# EAGLE board dookie (EAGLE 5.06)
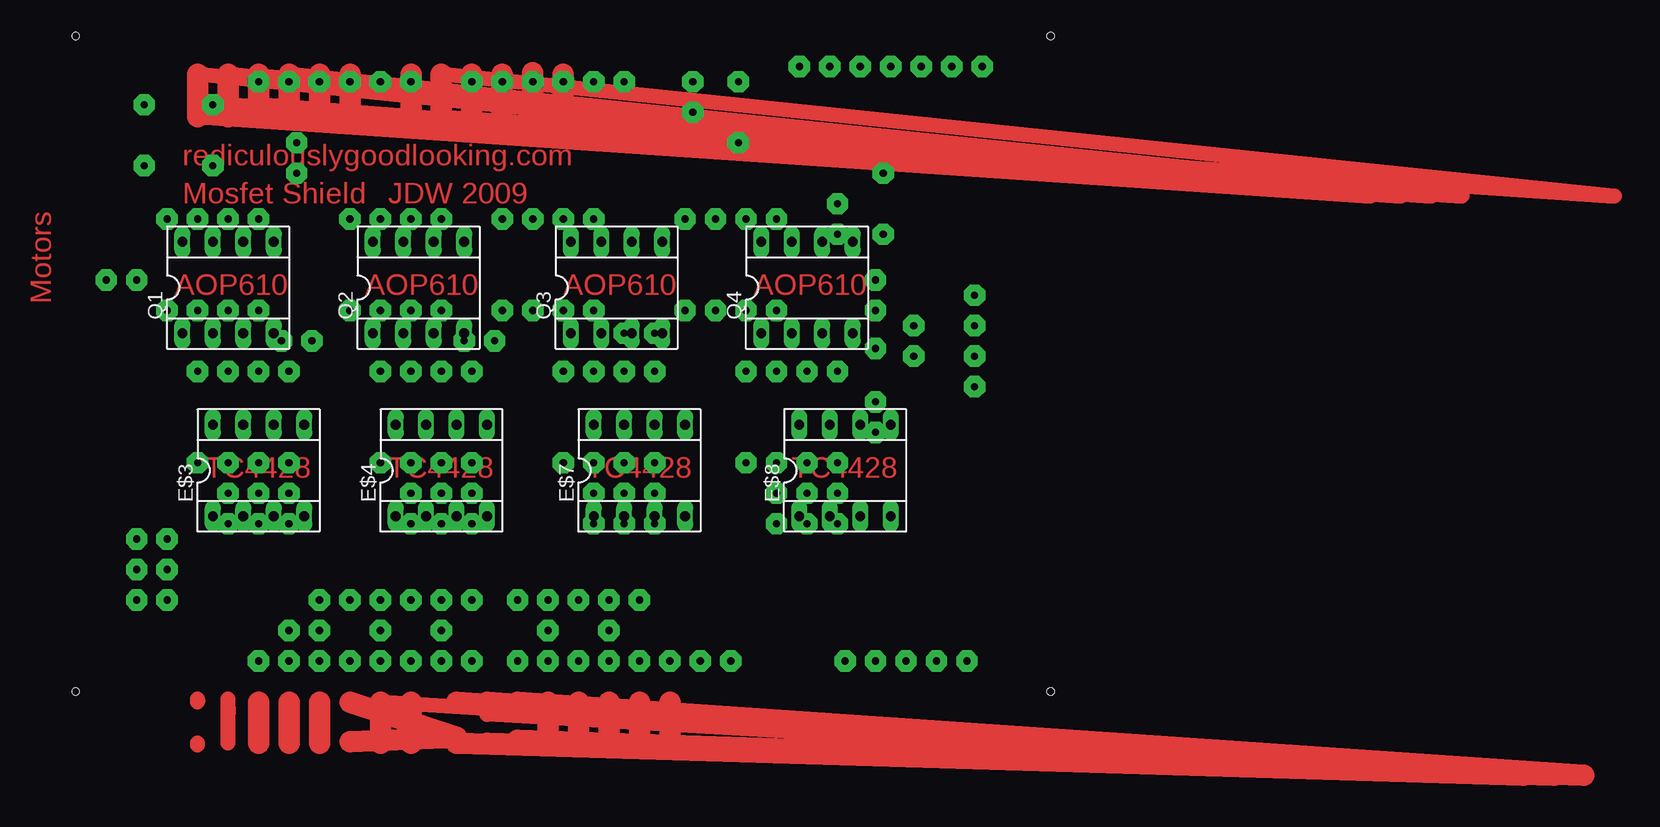
[diagram p0: board, top side]
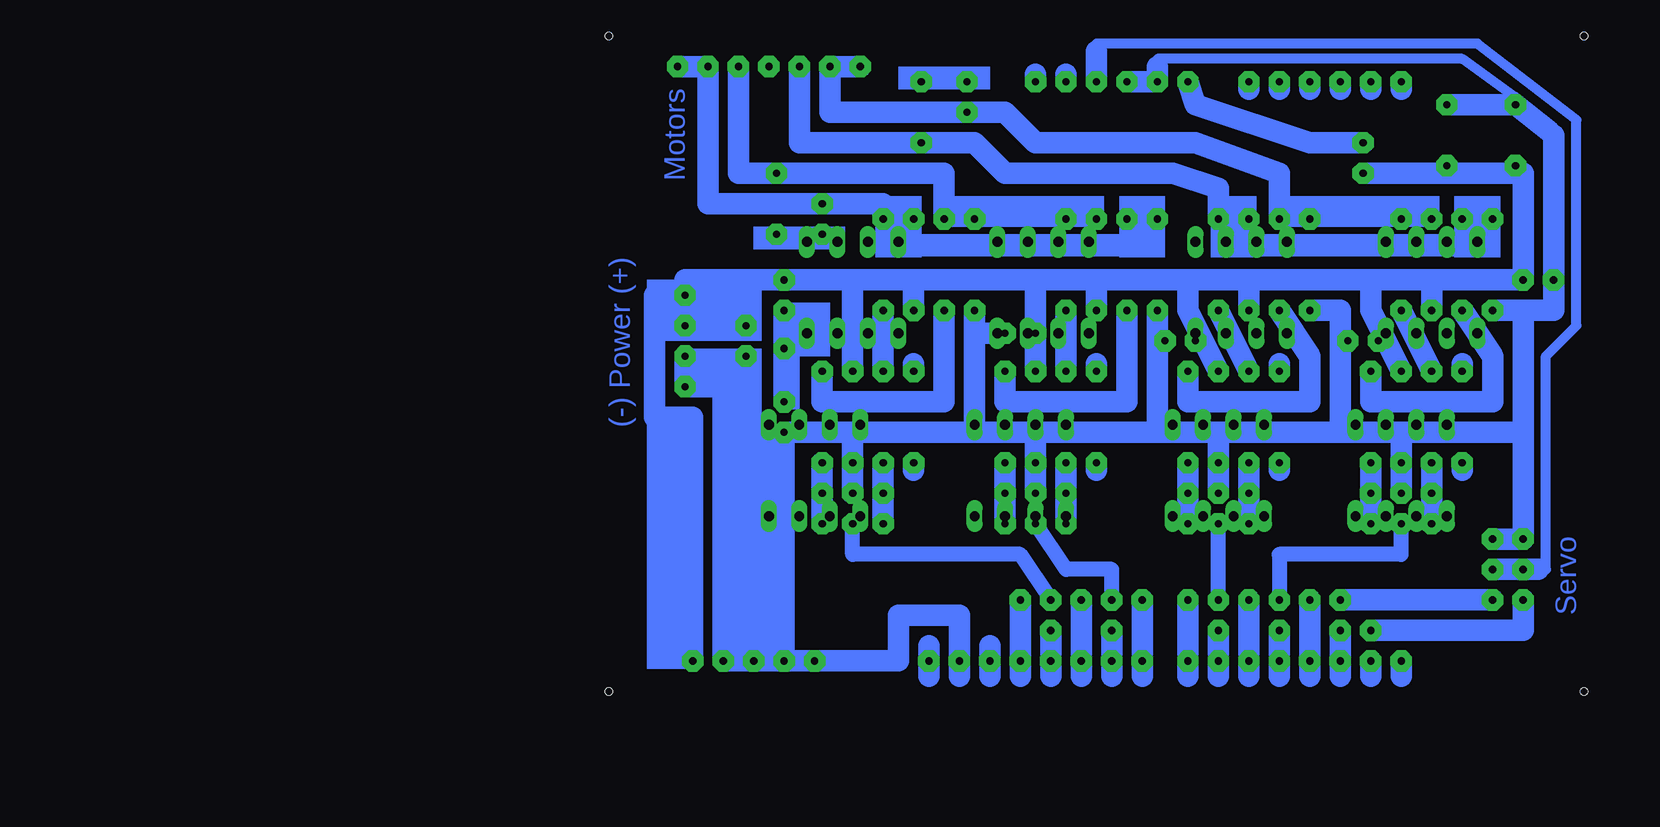
[diagram p1: board, bottom side, seen from below]

No outline drawn. Coordinates in mm, seen from the top.
Copper layers (1*16): Top 0.035mm / dielectric 1.5mm / Bottom 0.035mm
Design rules "default": minimum track width 10mil, minimum drill 24mil, track to track 8mil, track to pad 8mil, pad to pad 8mil, via to via 8mil, smd to smd 8mil, copper to edge 40mil, drill to drill 8mil, minimum pad ring 10mil, minimum via ring 8mil, stop-mask expansion 4mil, vias tented up to drill 0mil, thermal gap 10mil
Holes 0.6 mm at 0,0 0,54.61 81.28,54.61 81.28,0

## Footprints (pad centres in the part's own frame; a part is rotated, then mirrored left to right if it is on the bottom)
SOCKET-08 = drill 0.813 long: 1 -3.81,-3.81; 2 -1.27,-3.81; 3 1.27,-3.81; 4 3.81,-3.81; 5 3.81,3.81; 6 1.27,3.81; 7 -1.27,3.81; 8 -3.81,3.81

## Placement (x,y rotation side)
E$3  TC4427  [SOCKET-08]  15.24,18.41 0 top
E$4  TC4427  [SOCKET-08]  30.48,18.41 0 top
E$7  TC4427  [SOCKET-08]  46.99,18.41 0 top
E$8  TC4427  [SOCKET-08]  64.14,18.41 0 top
Q1  AOP610  [SOCKET-08]  12.7,33.66 0 top
Q2  AOP610  [SOCKET-08]  28.57,33.66 0 top
Q3  AOP610  [SOCKET-08]  45.09,33.66 0 top
Q4  AOP610  [SOCKET-08]  60.96,33.66 0 top

## Library data of the parts
E$3 E$4 E$7 E$8 Q1-Q4 = ic-package

## Tracks (layer width: path | path; a pad name or v marks a point on that pad's centre or on a via)
5V  (via drill 0.6 pad 1.78)
  Bottom 0.813: 3.81,10.16 3.17,10.16 3.17,27.94 0.64,30.48 0.64,47.62 8.89,53.98 40.64,53.98 40.64,53.34
  Bottom 1.778: 3.81,10.16 v7.62,10.16 | 40.64,53.34 v40.64,50.8
GND  (via drill 0.6 pad 1.78)
  Bottom 0.813: 2.54,46.35 2.54,46.99 5.71,49.53 10.16,52.7 35.56,52.7 v35.56,50.8
  Bottom 1.778: v66.67,2.54 v69.22,2.54 v71.75,2.54 71.75,25.4 v74.93,25.4 v74.93,27.94 | v66.67,2.54 v64.14,2.54 57.15,2.54 57.15,6.35 52.07,6.35 v52.07,2.54 52.07,1.27 | v60.96,16.51 v60.96,19.05 60.96,21.59 | 60.96,21.59 v66.67,21.59 v66.67,2.54 | v45.72,16.51 v45.72,19.05 45.72,21.59 | 50.8,21.59 60.96,21.59 | 50.8,21.59 50.8,29.84 | 50.8,29.84 v50.8,31.75 | 45.72,21.59 50.8,21.59 | v30.48,16.51 v30.48,19.05 30.48,21.59 | 35.56,21.59 45.72,21.59 | 35.56,21.59 v35.56,31.75 | 30.48,21.59 35.56,21.59 | v15.24,16.51 v15.24,19.05 15.24,21.59 | 20.32,21.59 30.48,21.59 | 20.32,21.59 20.32,31.75 v22.86,31.75 | 15.24,21.59 20.32,21.59 | 5.08,21.59 v5.08,12.7 v7.62,12.7 | v38.1,50.8 v35.56,50.8 35.56,52.07 | 5.08,21.59 5.08,31.75 | 5.08,21.59 15.24,21.59 | 5.08,31.75 3.81,31.75 | 5.08,31.75 2.54,31.75 v2.54,34.29 2.54,46.35 v5.71,48.9 v11.43,48.9 | 5.08,31.75 v7.62,31.75 | v48.26,29.84 50.8,29.84
S$1  (via drill 0.6 pad 1.78)
  Bottom 0.813: v43.18,19.05 v43.18,16.51
  Bottom 1.778: v43.18,13.97 v43.18,19.05
S$2  (via drill 0.6 pad 1.78)
  Bottom 1.778: v15.24,2.54 15.24,1.27
S$3  (via drill 0.6 pad 1.78)
  Bottom 1.27: v15.24,13.97 15.24,11.43 25.4,11.43 v25.4,7.62
S$4  (via drill 0.6 pad 1.78)
  Bottom 1.778: v39.37,5.08 39.37,3.17
S$5
  Bottom 1.778: 49.53,1.27 49.53,3.81
S$6  (via drill 0.6 pad 1.78)
  other vias: 48.26,16.51
S$7
  Bottom 1.778: 54.61,1.27 54.61,3.81
S$8  (via drill 0.6 pad 1.78)
  Bottom 1.778: v25.4,5.08 25.4,3.17
S$9  (via drill 0.6 pad 1.78)
  Bottom 1.27: v55.88,39.37 55.88,36.83 38.1,36.83 v38.1,39.37 | v38.1,39.37 v35.56,39.37 v38.1,39.37
  Bottom 1.778: v75.56,52.07 v73.03,52.07 73.03,40.64 v63.5,40.64 58.42,40.64 v58.42,39.37 v55.88,39.37
S$10  (via drill 0.6 pad 1.78)
  Bottom 1.778: v44.45,5.08 44.45,3.17
S$11  (via drill 0.6 pad 1.78)
  Bottom 1.27: v40.64,39.37 v53.34,39.37
  Bottom 1.778: v70.48,52.07 70.48,43.18 v67.31,43.18 53.34,43.18 v53.34,39.37
S$12  (via drill 0.6 pad 1.78)
  Bottom 1.778: v17.78,2.54 17.78,1.27
S$13  (via drill 0.6 pad 1.78)
  Bottom 1.778: 76.2,33.02 77.47,33.02 77.47,22.86 74.3,22.86 v74.3,2.54
S$14  (via drill 0.6 pad 1.78)
  other vias: 45.72,29.84
S$15  (via drill 0.6 pad 1.78)
  Bottom 0.406: v17.78,13.97 v17.78,16.51
  Bottom 1.27: v17.78,13.97 v17.78,16.51
  Bottom 1.778: v17.78,13.97 v17.78,19.05
S$16  (via drill 0.6 pad 1.78)
  other vias: 69.85,30.48
S$17  (via drill 0.6 pad 1.78)
  other vias: 5.71,43.81
S$18  (via drill 0.6 pad 1.78)
  Bottom 1.778: v5.08,7.62 5.08,5.08 v17.78,5.08
S$19  (via drill 0.6 pad 1.78)
  other vias: 5.08,10.16
S$20  (via drill 0.6 pad 1.78)
  other vias: 11.43,43.81
S$21  (via drill 0.6 pad 1.78)
  other vias: 67.94,52.07
S$22  (via drill 0.6 pad 1.78)
  other vias: 32.38,29.21
S$23  (via drill 0.6 pad 1.78)
  other vias: 15.24,39.37
S$24  (via drill 0.6 pad 1.78)
  Bottom 1.778: v12.7,26.67 v15.24,31.75
S$25  (via drill 0.6 pad 1.78)
  Bottom 1.778: v43.18,50.8 43.18,51.44
S$26  (via drill 0.6 pad 1.78)
  Bottom 1.778: v45.72,50.8 45.72,51.44
S$27
  Top 1.27: 107.95,41.27 10.16,48.9 | 107.95,41.27 10.16,51.44 | 107.95,41.27 10.16,47.88 10.16,47.62
  Top 1.778: 10.16,47.88 10.16,51.44
S$28  (via drill 0.6 pad 1.78)
  other vias: 22.86,39.37
S$29  (via drill 0.6 pad 1.78)
  Bottom 1.778: 27.94,50.16 v27.94,50.8
S$30  (via drill 0.6 pad 1.78)
  Bottom 1.778: 27.94,3.17 v27.94,7.62
S$31  (via drill 0.6 pad 1.78)
  Bottom 1.778: 25.4,50.16 v25.4,50.8
S$32  (via drill 0.6 pad 1.78)
  Bottom 1.27: v45.72,13.97 43.18,10.16 39.37,10.16 v39.37,7.62
S$33  (via drill 0.6 pad 1.78)
  other vias: 34.92,29.21
S$34  (via drill 0.6 pad 1.78)
  Bottom 1.778: 22.86,50.16 v22.86,50.8
S$35  (via drill 0.6 pad 1.78)
  Bottom 1.778: v7.62,7.62 v20.32,7.62
S$36  (via drill 0.6 pad 1.78)
  Bottom 1.778: v30.48,5.08 30.48,3.17
S$37  (via drill 0.6 pad 1.78)
  Bottom 1.778: 20.32,50.16 v20.32,50.8
S$38  (via drill 0.6 pad 1.78)
  Bottom 1.778: v66.67,31.75 v66.67,28.57 v66.67,24.13
S$39  (via drill 0.6 pad 1.78)
  Bottom 1.778: 17.78,50.16 v17.78,50.8
S$40  (via drill 0.6 pad 1.78)
  Bottom 1.778: 15.24,50.16 v15.24,50.8
S$41  (via drill 0.6 pad 1.78)
  Bottom 1.778: v20.32,5.08 v20.32,2.54 20.32,1.27
S$42  (via drill 0.6 pad 1.78)
  Bottom 1.778: v22.86,7.62 v22.86,2.54 22.86,1.27
S$43  (via drill 0.6 pad 1.78)
  Bottom 1.778: v25.4,2.54 25.4,1.27
S$44  (via drill 0.6 pad 1.78)
  Bottom 1.27: v12.7,39.37 v25.4,39.37
  Bottom 1.778: v25.4,39.37 25.4,43.18 32.38,45.72 45.72,45.72 48.26,48.26 v51.44,48.26 62.87,48.26 v62.87,52.07 v60.33,52.07
S$45  (via drill 0.6 pad 1.78)
  Bottom 1.778: v25.4,31.75 22.86,27.94 22.86,24.13 33.02,24.13 v33.02,26.67
S$46  (via drill 0.6 pad 1.78)
  Bottom 1.778: v27.94,2.54 27.94,1.27
S$47  (via drill 0.6 pad 1.78)
  Bottom 1.778: v30.48,2.54 30.48,1.27
S$48  (via drill 0.6 pad 1.78)
  Bottom 1.778: v33.02,2.54 33.02,1.27
S$49  (via drill 0.6 pad 1.78)
  Bottom 1.27: v30.48,39.37 v27.94,39.37 27.94,36.83 10.16,36.83 v10.16,39.37 v7.62,39.37
  Bottom 1.778: v30.48,39.37 30.48,41.91 34.29,43.18 48.26,43.18 50.8,45.72 v55.24,45.72 65.41,45.72 v65.41,52.07
S$50
  Top 1.27: 30.48,51.44 128.27,41.27 30.48,47.88 30.48,47.62
  Top 1.778: 30.48,47.88 30.48,51.44
S$51  (via drill 0.6 pad 1.78)
  other vias: 58.42,16.51
S$52  (via drill 0.6 pad 1.78)
  Bottom 1.778: v36.83,2.54 36.83,1.27
S$53  (via drill 0.6 pad 1.78)
  other vias: 17.14,29.21
S$54  (via drill 0.6 pad 1.78)
  Bottom 1.778: v10.16,31.75 7.62,27.94 7.62,24.13 17.78,24.13 v17.78,26.67
S$55
  Top 1.27: 113.03,41.27 15.24,48.9 | 113.03,41.27 15.24,51.31 | 113.03,41.27 15.24,47.88 15.24,47.62
  Top 1.778: 15.24,51.44 15.24,51.31 15.24,47.88
S$56  (via drill 0.6 pad 1.78)
  other vias: 63.5,16.51
S$57  (via drill 0.6 pad 1.78)
  Bottom 1.778: v39.37,2.54 39.37,1.27
S$58  (via drill 0.6 pad 1.78)
  other vias: 19.68,29.21
S$59  (via drill 0.6 pad 1.78)
  Bottom 0.61: v44.45,7.62 44.45,7.75
  Bottom 1.27: v60.96,13.97 60.96,11.43 46.99,11.43 v44.45,7.62
S$60
  Top 1.27: 34.29,-4.32 34.29,-4.45 | 25.4,-4.45 25.4,-4.32 25.4,-4.19 | 25.4,-0.64 25.4,-0.89 123.19,-6.99 | 123.19,-6.99 34.29,-1.91 | 25.4,-3.94 123.19,-6.99
  Top 1.778: 34.29,-0.89 123.19,-6.99 34.29,-4.32 | 25.4,-3.94 25.4,-0.89 | 25.4,-3.94 25.4,-4.19 | 25.4,-3.94 25.4,-4.32
S$61  (via drill 0.6 pad 1.78)
  Bottom 1.778: v41.91,2.54 41.91,1.27
S$62  (via drill 0.6 pad 1.78)
  other vias: 55.24,50.8
S$63  (via drill 0.6 pad 1.78)
  Bottom 1.778: v44.45,2.54 44.45,1.27
S$64
  Top 1.27: 110.49,41.27 12.7,48.9 | 110.49,41.27 12.7,51.44 | 110.49,41.27 12.7,47.88 12.7,47.62
  Top 1.778: 12.7,47.88 12.7,51.44
S$65  (via drill 0.6 pad 1.78)
  Bottom 1.27: v30.48,7.62 v30.48,13.97
S$66  (via drill 0.6 pad 1.78)
  Bottom 1.778: v46.99,7.62 v46.99,2.54 46.99,1.27
S$67
  Top 1.27: 17.78,51.44 115.57,41.27 17.78,47.88 17.78,47.62
  Top 1.778: 17.78,47.88 17.78,51.44
S$68  (via drill 0.6 pad 1.78)
  other vias: 49.53,2.54
S$69  (via drill 0.6 pad 1.78)
  other vias: 51.44,50.8
S$70  (via drill 0.6 pad 1.78)
  other vias: 54.61,2.54
S$71  (via drill 0.6 pad 1.78)
  Bottom 1.778: 33.02,3.17 v33.02,7.62
S$72  (via drill 0.6 pad 1.78)
  other vias: 63.5,38.1
S$73  (via drill 0.6 pad 1.78)
  other vias: 67.31,38.1
S$74  (via drill 0.6 pad 1.78)
  other vias: 69.85,27.94
S$75
  Top 1.27: 10.16,-4.45 10.16,-4.32
S$96  (via drill 0.6 pad 1.78)
  other vias: 43.18,39.37
S$98  (via drill 0.6 pad 1.78)
  other vias: 50.8,39.37
S$104  (via drill 0.6 pad 1.78)
  Bottom 1.778: v38.1,31.75 38.1,24.13 48.26,24.13 v48.26,26.67
S$108  (via drill 0.6 pad 1.78)
  Bottom 1.778: v53.34,31.75 53.34,24.13 63.5,24.13 v63.5,26.67
S$111
  Top 1.27: 20.32,48.26 20.32,48.9 | 20.32,48.26 20.32,47.88 20.32,47.62 | 20.32,48.26 20.32,51.44
  Top 1.778: 20.32,47.88 20.32,51.44
S$114
  Top 1.27: 22.86,47.88 22.86,47.62
  Top 1.778: 22.86,47.88 22.86,51.44
S$115
  Top 1.27: 27.94,48.26 27.94,48.9 | 27.94,48.26 27.94,47.88 27.94,47.62 | 27.94,48.26 27.94,51.44
  Top 1.778: 27.94,47.88 27.94,51.44
S$116
  Top 1.27: 33.02,48.26 33.02,48.9 | 33.02,48.26 33.02,47.88 33.02,47.62 | 33.02,48.26 33.02,51.44
  Top 1.778: 33.02,47.88 33.02,51.44
S$117
  Top 1.27: 35.56,47.88 35.56,47.62
  Top 1.778: 35.56,47.88 35.56,51.44
S$118
  Top 1.27: 38.1,48.26 38.1,48.9 | 38.1,48.26 38.1,47.88 38.1,47.62 | 38.1,48.26 38.1,51.44
  Top 1.778: 38.1,47.88 38.1,51.56
S$119
  Top 1.27: 40.64,47.88 40.64,47.62
  Top 1.778: 40.64,47.88 40.64,51.44
S$120
  Top 1.27: 10.16,-0.64 10.16,-0.89
S$121
  Top 1.27: 12.7,-1.27 12.7,-0.64 | 12.7,-1.27 12.7,-1.91 | 12.7,-4.32 12.7,-1.27
S$122
  Top 1.27: 15.24,-0.89 15.24,-0.64 | 15.24,-4.32 15.24,-4.45
  Top 1.778: 15.24,-4.32 15.24,-0.89
S$123
  Top 1.27: 17.78,-0.89 17.78,-0.64 | 17.78,-4.32 17.78,-4.45
  Top 1.778: 17.78,-4.32 17.78,-0.89
S$124
  Top 1.27: 20.32,-0.89 20.32,-0.64 | 20.32,-4.19 20.32,-4.32
  Top 1.778: 20.32,-3.94 20.32,-0.89 | 20.32,-3.94 20.32,-4.19 | 20.32,-3.94 20.32,-4.32
S$126
  Top 1.27: 27.94,-1.27 27.94,-1.91 | 27.94,-1.27 27.94,-1.02 | 27.94,-0.89 27.94,-0.64 | 27.94,-3.94 27.94,-1.27 | 27.94,-4.32 27.94,-4.45
  Top 1.778: 27.94,-1.02 27.94,-0.89 27.94,-3.94 27.94,-4.32
S$127
  Top 1.27: 31.75,-4.32 31.75,-4.45
  Top 1.778: 31.75,-0.89 120.65,-6.99 31.75,-4.32
S$128  (via drill 0.6 pad 1.78)
  Bottom 1.778: v10.16,26.67 10.16,27.3
S$129
  Top 1.27: 36.83,-4.45 36.83,-4.32 36.83,-4.19 | 125.73,-6.99 36.83,-1.91
  Top 1.778: 36.83,-0.89 125.73,-6.99 36.83,-4.06 | 36.83,-4.06 36.83,-4.19 | 36.83,-4.06 36.83,-4.32
S$130
  Top 1.27: 39.37,-0.89 39.37,-0.64 | 39.37,-4.32 39.37,-4.45
  Top 1.778: 39.37,-4.32 39.37,-0.89
S$131
  Top 1.27: 41.91,-0.89 41.91,-0.64 | 41.91,-1.02 41.91,-4.32 41.91,-4.45
  Top 1.778: 41.91,-1.02 41.91,-0.89 41.91,-4.32
S$132
  Top 1.27: 44.45,-0.89 44.45,-0.64 | 44.45,-4.32 44.45,-4.45
  Top 1.778: 44.45,-4.32 44.45,-0.89
S$133
  Top 1.27: 46.99,-0.89 46.99,-0.64 | 46.99,-4.32 46.99,-4.45
  Top 1.778: 46.99,-4.32 46.99,-0.89
S$134
  Top 1.27: 49.53,-0.89 49.53,-0.64 | 49.53,-4.19 49.53,-1.27 | 49.53,-4.32 49.53,-4.45
  Top 1.778: 49.53,-1.27 49.53,-0.89 49.53,-4.19 49.53,-4.32
S$138  (via drill 0.6 pad 1.78)
  Bottom 1.778: v25.4,26.67 25.4,27.3
S$139  (via drill 0.6 pad 1.78)
  Bottom 1.778: v27.94,26.67 v30.48,31.75
S$142  (via drill 0.6 pad 1.78)
  Bottom 1.778: v10.16,19.05 10.16,18.41
S$143  (via drill 0.6 pad 1.78)
  Bottom 0.813: v12.7,13.97 v12.7,16.51
  Bottom 1.778: v12.7,13.97 v12.7,19.05
S$146  (via drill 0.6 pad 1.78)
  Bottom 1.778: v25.4,19.05 25.4,18.41
S$147  (via drill 0.6 pad 1.78)
  Bottom 0.406: v27.94,13.97 v27.94,16.51
  Bottom 0.813: v27.94,16.51 v27.94,19.05
  Bottom 1.27: v27.94,13.97 v27.94,16.51
  Bottom 1.778: v27.94,13.97 v27.94,19.05
S$149  (via drill 0.6 pad 1.78)
  Bottom 0.406: v33.02,13.97 v33.02,16.51
  Bottom 1.27: v33.02,13.97 v33.02,16.51
  Bottom 1.778: v33.02,13.97 v33.02,19.05
S$150  (via drill 0.6 pad 1.78)
  Bottom 1.778: v40.64,26.67 40.64,27.3
S$151  (via drill 0.6 pad 1.78)
  Bottom 1.778: v43.18,26.67 v43.18,31.75
S$154  (via drill 0.6 pad 1.78)
  Bottom 1.778: v55.88,26.67 55.88,27.3
S$155  (via drill 0.6 pad 1.78)
  Bottom 1.778: v58.42,26.67 v58.42,31.75
S$158  (via drill 0.6 pad 1.78)
  Bottom 1.778: v40.64,19.05 40.64,18.41
S$159  (via drill 0.6 pad 1.78)
  Bottom 1.778: 41.91,3.17 v41.91,7.62
S$161  (via drill 0.6 pad 1.78)
  Bottom 1.778: 36.83,3.17 v36.83,7.62
S$163  (via drill 0.6 pad 1.78)
  Bottom 1.778: v48.26,13.97 v48.26,19.05
S$164  (via drill 0.6 pad 1.78)
  Bottom 1.778: v55.88,19.05 55.88,18.41
S$165  (via drill 0.6 pad 1.78)
  Bottom 1.778: v58.42,13.97 v58.42,19.05
S$167  (via drill 0.6 pad 1.78)
  Bottom 1.778: v63.5,13.97 v63.5,19.05
S$169
  Top 1.27: 22.86,-0.89 22.86,-0.64 | 22.86,-4.19 22.86,-4.45
  Top 1.778: 22.86,-0.89 31.75,-3.81 22.86,-4.19
VCC  (via drill 0.6 pad 1.78)
  Bottom 1.778: v74.93,33.02 v74.93,30.48 70.48,30.48 | v74.93,33.02 74.93,34.29 v66.67,34.29 60.96,34.29 | 60.96,34.29 v60.96,26.67 | 55.88,34.29 60.96,34.29 | 55.88,34.29 v55.88,31.75 | 45.72,34.29 55.88,34.29 | 45.72,34.29 v45.72,26.67 | v30.48,26.67 33.02,31.75 33.02,34.29 | 40.64,34.29 45.72,34.29 | 40.64,34.29 v40.64,31.75 | 33.02,34.29 40.64,34.29 | v15.24,26.67 17.78,31.75 17.78,34.29 | 27.94,34.29 33.02,34.29 | 27.94,34.29 v27.94,31.75 | 17.78,34.29 27.94,34.29 | 12.7,34.29 17.78,34.29 | 12.7,34.29 v12.7,31.75 | v18.41,43.18 5.08,43.18 v5.08,34.29 12.7,34.29 | v74.93,33.02 75.56,33.02
VIN  (via drill 0.6 pad 1.78)
  Bottom 1.778: v33.02,50.8 32.38,48.9 22.86,45.72 v18.41,45.72
(copper drawn outside any net)
  shapes: Bottom area x27

## Text on the board
Top: rediculouslygoodlooking.com | Mosfet Shield | JDW 2009 | Motors | AOP610 | AOP610 | AOP610 | AOP610 | TC4428 | TC4428 | TC4428 | TC4428
Bottom: Motors | (-) Power (+) | Servo